# EAGLE board fan-faker-1side (EAGLE 6.6.0)
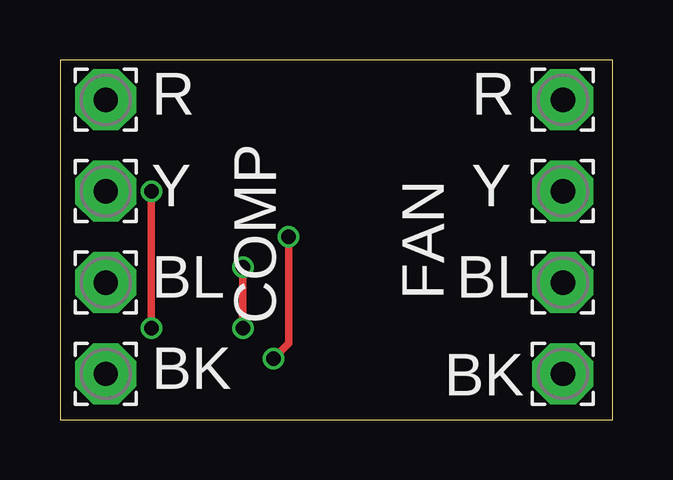
[diagram p0: board, top side]
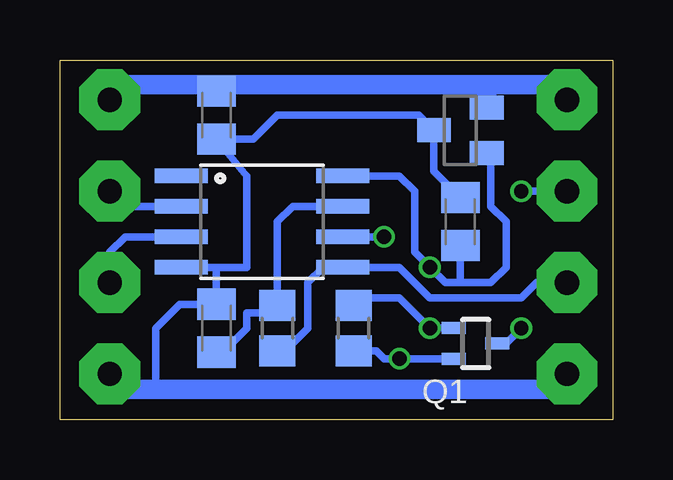
[diagram p1: board, bottom side, seen from below]

Size 23.03 x 15 mm. Coordinates in mm from the lower left corner, seen from the top.
Outline: 0,0 23.03,0 23.03,15 0,15 0,0
Copper layers (1*16): Top 0.035mm / dielectric 1.5mm / Bottom 0.035mm
Design rules "SeeedStudio_2layer_DRU_no_angle_20140221": minimum track width 6mil, minimum drill 12mil, track to track 6mil, track to pad 6mil, pad to pad 6mil, via to via 6mil, smd to smd 0mil, copper to edge 10mil, drill to drill 10mil, minimum pad ring 10mil, minimum via ring 6mil, stop-mask expansion 2mil, vias tented up to drill 100mil, thermal gap 10mil

## Footprints (pad centres in the part's own frame; a part is rotated, then mirrored left to right if it is on the bottom)
2,54/1,0 = drill 1.016 pad 2.54 octagon: 1 0,0
C0805K = smd 1.3 x 1.6: 1 -1,0; 2 1,0
SOT323 = smd 0.5 x 1: 1 0,0.9; 2 -0.65,-0.9; 3 0.65,-0.9
R0805 = smd 1.3 x 1.5: 1 -0.95,0; 2 0.95,0
SO08-EIAJ = smd 0.61 x 2.21: 1 -1.905,-3.378; 2 -0.635,-3.378; 3 0.635,-3.378; 4 1.905,-3.378; 5 1.905,3.353; 6 0.635,3.353; 7 -0.635,3.353; 8 -1.905,3.353
SOT23 = smd 1 x 1.4: 1 -0.95,-1.1; 2 0.95,-1.1; 3 0,1.1

## Placement (x,y rotation side)
BLACK_1  BLK  [2,54/1,0]  20.95,1.91 0 top
BLACK_2  BLK  [2,54/1,0]  1.91,1.91 0 top
BLUE_1  BLU  [2,54/1,0]  20.95,5.71 0 top
BLUE_2  BLU  [2,54/1,0]  1.91,5.71 0 top
C1  100nF  [C0805K]  16.51,12.7 270 bottom
C2  1uF  [C0805K]  6.35,8.26 90 bottom
C3  1uF  [C0805K]  16.51,3.81 90 bottom
Q1  BSS138BKW  [SOT323]  5.71,3.17 270 bottom
R1  10k  [R0805]  10.79,3.81 270 bottom
R2  8.2k  [R0805]  13.97,3.81 90 bottom
RED_1  RED  [2,54/1,0]  20.95,13.34 0 top
RED_2  RED  [2,54/1,0]  1.91,13.34 0 top
U1  Tiny85-20-SMT  [SO08-EIAJ]  14.61,8.26 270 bottom
U$2  LM3480  [SOT23]  6.35,12.06 90 bottom
YELLOW_1  YLW  [2,54/1,0]  20.95,9.53 0 top
YELLOW_2  YLW  [2,54/1,0]  1.91,9.53 0 top

## Library data of the parts
BLACK_1 BLACK_2 BLUE_1 BLUE_2 RED_1 RED_2 YELLOW_1 YELLOW_2 = wirepad
C1-C3 R1 R2 = rcl
Q1 U$2 = misc-user
U1 = SparkFun-DigitalIC; PROD_ID: IC-09092

## Nets
GND: BLACK_1.1 BLACK_2.1 C1.2 C2.2 C3.2 U1.4 U$2.3
PWM_C: BLUE_2.1 R2.1 U1.5
PWM_F: BLUE_1.1 U1.3
PWM_M: C3.1 R2.2 U1.7
SENSE_C: Q1.1 YELLOW_2.1
SENSE_F: U1.2 YELLOW_1.1
SENSE_M: Q1.3 R1.2 U1.6
V5: C2.1 Q1.2 R1.1 U1.8 U$2.1
VIN: C1.1 RED_1.1 RED_2.1 U$2.2

## Tracks (layer width: path | path; a pad name or v marks a point on that pad's centre or on a via)
GND
  Bottom 0.305: 19.05,1.27 19.05,3.81 18.05,4.81 C3.2 16.51,6.35 | C2.2 7.45,10.36 U$2.3 8.09,12.7 13.97,12.7 14.97,11.7 C1.2 15.24,10.16 15.24,6.35 16.51,6.35 | U1.4 16.51,6.35
  Bottom 0.813: BLACK_2.1 2.54,1.27 19.05,1.27 20.32,1.27 BLACK_1.1
PWM_C
  Bottom 0.305: R2.1 13.65,2.86 12.7,3.81 12.7,5.71 12.06,6.35 U1.5 8.89,6.35 7.62,5.08 3.81,5.08 3.17,5.71 BLUE_2.1
PWM_F
  Bottom 0.305: U1.3 20.32,7.62 20.95,6.99 BLUE_1.1
PWM_M
  Bottom 0.305: C3.1 16.24,2.81 15.24,3.81 15.24,4.45 14.29,4.45 R2.2 13.97,8.26 13.34,8.89 U1.7
SENSE_C  (via drill 0.6)
  Top 0.305: v3.81,3.81 v3.81,9.53
  Bottom 0.305: Q1.1 4.45,3.17 v3.81,3.81 | v3.81,9.53 YELLOW_2.1
SENSE_F
  Bottom 0.305: U1.2 20.32,8.89 YELLOW_1.1
SENSE_M  (via drill 0.6)
  Top 0.305: v9.53,7.62 9.53,3.17 v8.89,2.54
  Bottom 0.305: U1.6 v9.53,7.62 | Q1.3 6.63,2.54 v8.89,2.54 9.53,2.54 9.85,2.86 R1.2
V5  (via drill 0.6)
  Top 0.305: v7.62,3.81 v7.62,6.35
  Bottom 0.305: R1.1 10.47,5.08 8.89,5.08 7.63,3.83 Q1.2 7.61,3.83 v7.62,3.81 | U1.8 8.89,10.16 8.26,9.53 8.26,6.99 v7.62,6.35 6.99,5.71 6.35,5.71 | 6.35,5.71 5.08,5.71 4.45,6.35 4.45,8.26 5.08,8.89 5.08,10.95 U$2.1 | C2.1 6.35,5.71
VIN
  Bottom 0.305: 5.25,13.8 5.08,13.97 | C1.1 12.7,13.97
  Bottom 0.813: RED_2.1 2.54,13.97 5.08,13.97 12.7,13.97 20.32,13.97 RED_1.1 | U$2.2 5.25,13.8

## Text on the board
tNames: R | R | Y | Y | BL | FAN | BL | COMP | BK | BK